# EAGLE board UAVboard (EAGLE 4.16)
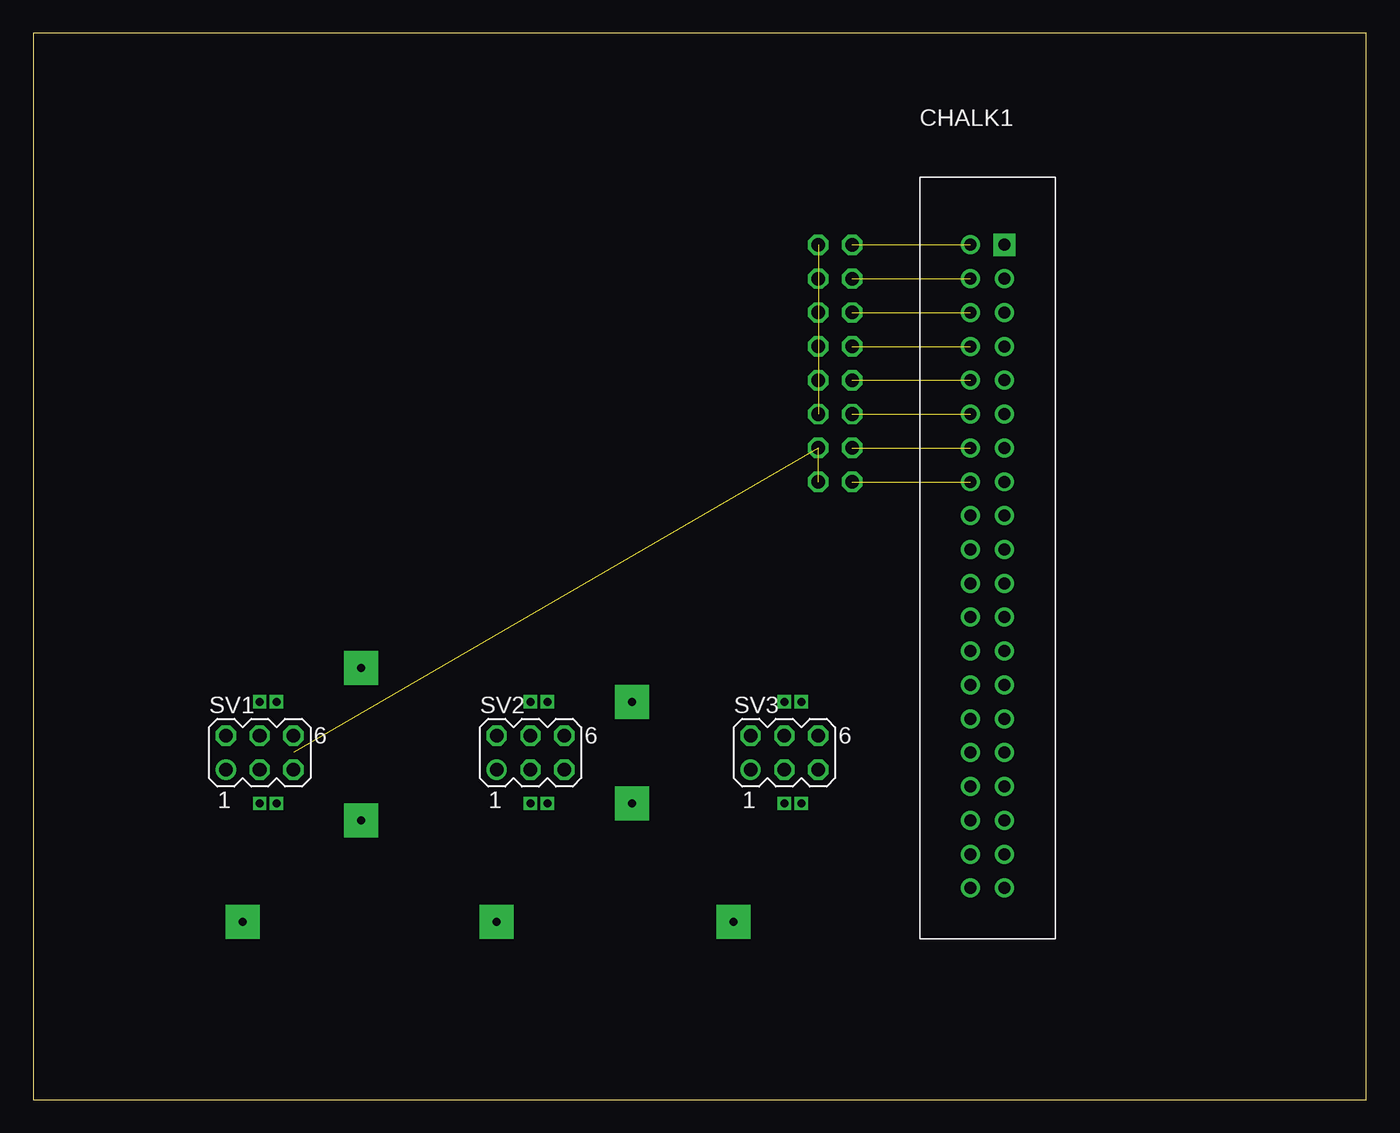
[diagram p0: board, top side]
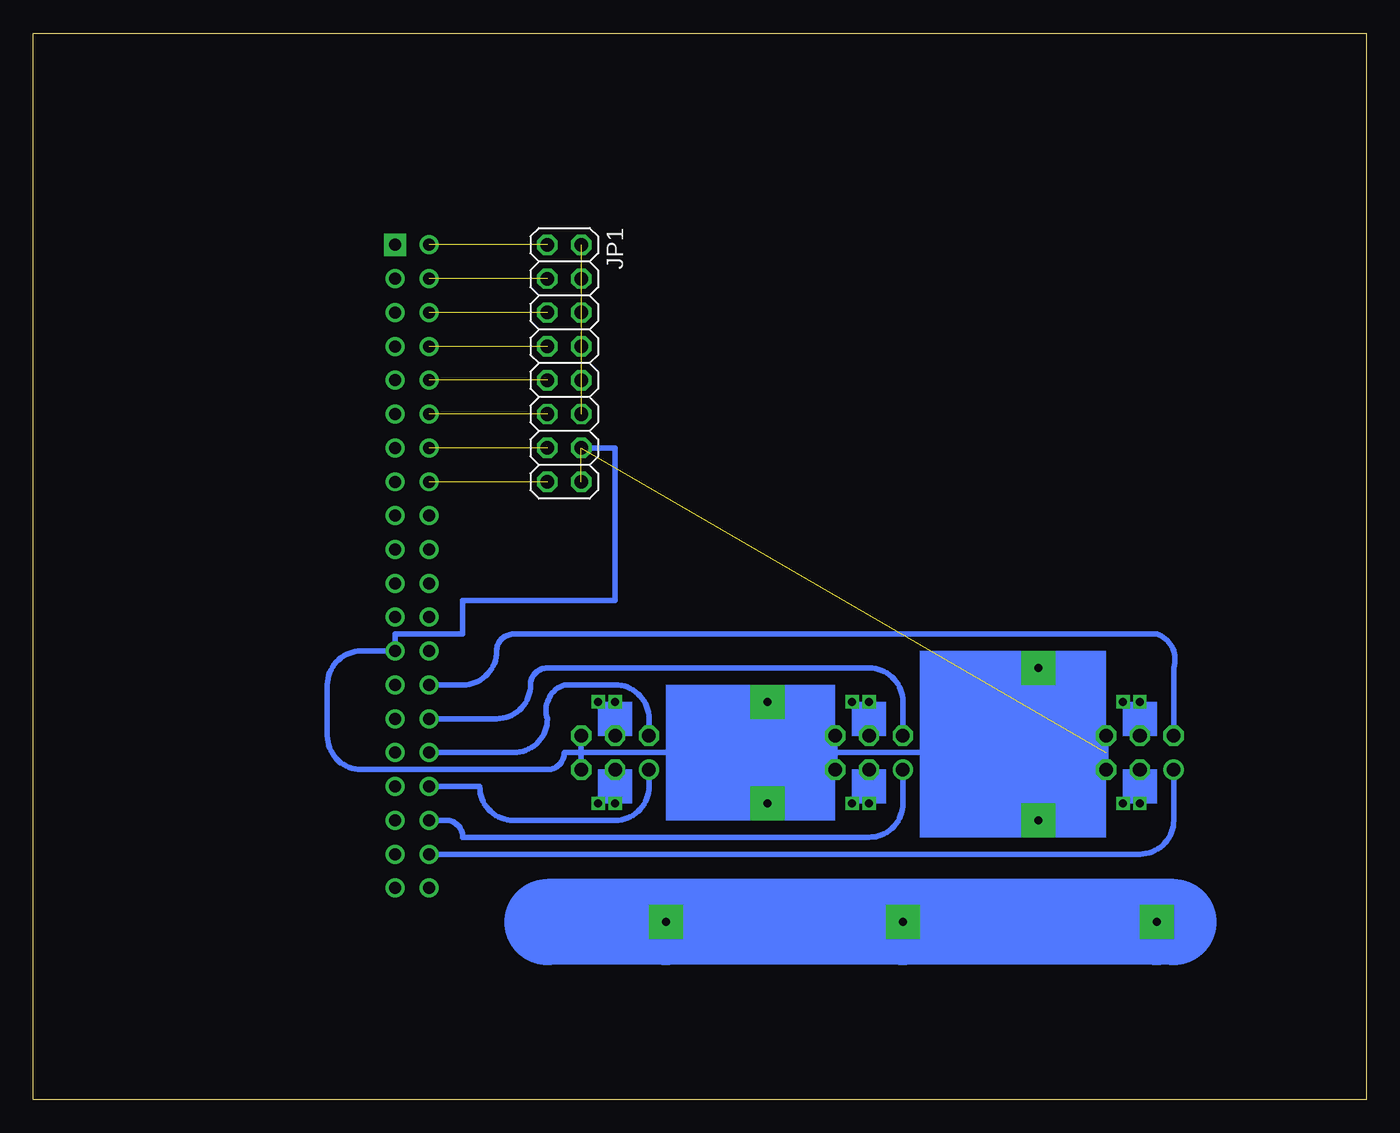
[diagram p1: board, bottom side, seen from below]

Size 100 x 80 mm. Coordinates in mm from the lower left corner, seen from the top.
Outline: 0,0 100,0 100,80 0,80 0,0
Copper layers (1*16): Top 0.035mm / dielectric 1.5mm / Bottom 0.035mm
Design rules "default": minimum track width 10mil, minimum drill 24mil, track to track 8mil, track to pad 8mil, pad to pad 8mil, via to via 8mil, smd to smd 8mil, copper to edge 40mil, drill to drill 8mil, minimum pad ring 10mil, minimum via ring 8mil, stop-mask expansion 4mil, vias tented up to drill 0mil, thermal gap 10mil

## Footprints (pad centres in the part's own frame; a part is rotated, then mirrored left to right if it is on the bottom)
CHALKHEAD = drill 0.9 pad 1.676 square: '1' -20.32,22.86 | drill 0.9 pad 1.422 round: '1'3 -20.32,-7.62; '2' -20.32,20.32; '3' -20.32,17.78; '4' -20.32,15.24; '5' -20.32,12.7; '6' -20.32,10.16; '7' -20.32,7.62; '8' -20.32,5.08; '9' -20.32,2.54; '10' -20.32,0; '11' -20.32,-2.54; '12' -20.32,-5.08; '14' -20.32,-10.16; '15' -20.32,-12.7; '16' -20.32,-15.24; '17' -20.32,-17.78; '18' -20.32,-20.32; '19' -20.32,-22.86; '20' -20.32,-25.4; '21' -22.86,-25.4; '22' -22.86,-22.86; '23' -22.86,-20.32; '24' -22.86,-17.78; '25' -22.86,-15.24; '26' -22.86,-12.7; '27' -22.86,-10.16; '28' -22.86,-7.62; '29' -22.86,-5.08; '30' -22.86,-2.54; '31' -22.86,0; '32' -22.86,2.54; '33' -22.86,5.08; '34' -22.86,7.62; '35' -22.86,10.16; '36' -22.86,12.7; '37' -22.86,15.24; '38' -22.86,17.78; '39' -22.86,20.32; '40' -22.86,22.86
2X08 = drill 1.016 octagon: 1 -8.89,-1.27; 2 -8.89,1.27; 3 -6.35,-1.27; 4 -6.35,1.27; 5 -3.81,-1.27; 6 -3.81,1.27; 7 -1.27,-1.27; 8 -1.27,1.27; 9 1.27,-1.27; 10 1.27,1.27; 11 3.81,-1.27; 12 3.81,1.27; 13 6.35,-1.27; 14 6.35,1.27; 15 8.89,-1.27; 16 8.89,1.27
MA03-2 = drill 1.016 round: 1 -2.54,-1.27 | drill 1.016 octagon: 2 -2.54,1.27; 3 0,-1.27; 4 0,1.27; 5 2.54,-1.27; 6 2.54,1.27

## Placement (x,y rotation side)
CHALK1  CHALKHEADER  [CHALKHEAD]  93.18,41.27 0 top
JP1  [2X08]  60.16,55.24 270 bottom
SV1  [MA03-2]  16.98,26.03 0 top
SV2  [MA03-2]  37.3,26.03 0 top
SV3  [MA03-2]  56.35,26.03 0 top

## Library data of the parts
CHALK1 = CCG_custom
JP1 = pinhead
SV1-SV3 = con-lstb

## Nets
N$1: CHALK1.'1'3 JP1.2 JP1.4 JP1.6 JP1.8 JP1.10 JP1.12 JP1.14 JP1.16 SV1.6 SV2.6 SV3.6
N$2: SV1.5 SV2.5 SV3.5
N$4: CHALK1.'22' SV1.1
N$5: CHALK1.'23' SV2.1
N$6: CHALK1.'24' SV3.1
N$7: CHALK1.'25' SV3.2
N$9: CHALK1.'27' SV1.2
N$10: CHALK1.'26' SV2.2
N$14: CHALK1.'40' JP1.1
N$15: SV3.3
N$27: CHALK1.'39' JP1.3
N$28: CHALK1.'38' JP1.5
N$29: CHALK1.'37' JP1.7
N$30: CHALK1.'36' JP1.9
N$31: CHALK1.'35' JP1.11
N$32: CHALK1.'34' JP1.13
N$33: CHALK1.'33' JP1.15

## Tracks (layer width: path | path; a pad name or v marks a point on that pad's centre or on a via)
N$1  (7 unrouted)
  Bottom 0.406: 58.89,26.03 60.16,26.03 arc90 61.43,24.76 75.4,24.76 arc90 77.94,27.3 77.94,31.11 arc90 75.4,33.65 CHALK1.'1'3 72.86,34.92 67.78,34.92 67.78,37.46 56.35,37.46 56.35,48.89 JP1.14 | SV1.6 19.52,26.03 39.84,26.03 | 39.84,26.03 SV2.6 | 58.89,26.03 SV3.6 | 39.84,26.03 58.89,26.03
N$2
  Bottom 0.406: 58.89,26.03 58.89,27.3 | 58.89,26.03 SV3.5 | 39.84,26.03 58.89,26.03 | 39.84,26.03 39.84,27.3 | 39.84,26.03 SV2.5 | SV1.5 19.52,26.03 39.84,26.03
N$3  (via drill 0.6)
  other vias: 16.98,29.84
N$4
  Bottom 0.406: CHALK1.'22' 16.98,18.41 arc-90 14.44,20.95 SV1.1
N$5
  Bottom 0.406: 34.76,23.49 SV2.1 34.76,22.22 arc90 37.3,19.68 67.78,19.68 arc-90 69.05,20.95 CHALK1.'23'
N$6
  Bottom 0.406: 69.05,23.49 CHALK1.'24' 66.51,23.49 arc-90 63.97,20.95 56.35,20.95 arc-90 53.81,23.49 SV3.1
N$7
  Bottom 0.406: CHALK1.'25' 63.97,26.03 arc-90 61.43,28.57 arc90 60.16,31.11 56.35,31.11 arc90 53.81,28.57 SV3.2
N$8  (via drill 0.6)
  other vias: 37.3,22.22
N$9
  Bottom 0.406: CHALK1.'27' 67.78,31.11 arc-90 65.24,33.65 arc90 63.97,34.92 15.71,34.92 arc90 14.44,32.38 SV1.2
N$10
  Bottom 0.406: CHALK1.'26' 65.24,28.57 arc-90 62.7,31.11 arc90 61.43,32.38 37.3,32.38 arc90 34.76,29.84 SV2.2
N$11  (via drill 0.6)
  other vias: 37.3,29.84
N$12  (via drill 0.6)
  other vias: 16.98,22.22
N$13  (via drill 0.6)
  other vias: 56.35,29.84
N$14  (1 unrouted)
N$15  (via drill 0.6)
  Bottom 0.406: SV3.3 v56.35,22.22
N$16  (via drill 0.6)
  other vias: 18.25,22.22
N$17  (via drill 0.6)
  other vias: 18.25,29.84
N$18  (via drill 0.6)
  other vias: 38.57,29.84
N$19  (via drill 0.6)
  other vias: 38.57,22.22
N$20  (via drill 0.6)
  other vias: 57.62,29.84
N$21  (via drill 0.6)
  other vias: 57.62,22.22
N$22  (via drill 0.6 pad 2.54)
  Bottom 6.452: 14.44,13.33 v15.71,13.33 v34.76,13.33 v52.54,13.33 61.43,13.33
N$23  (via drill 0.6 pad 2.54)
  other vias: 24.6,32.38
N$24  (via drill 0.6 pad 2.54)
  other vias: 44.92,29.84
N$25  (via drill 0.6 pad 2.54)
  other vias: 24.6,20.95
N$26  (via drill 0.6 pad 2.54)
  other vias: 44.92,22.22
N$27  (1 unrouted)
N$28  (1 unrouted)
N$29  (1 unrouted)
N$30  (1 unrouted)
N$31  (1 unrouted)
N$32  (1 unrouted)
N$33  (1 unrouted)
(copper drawn outside any net)
  shapes: Bottom area x9